# EAGLE board Light module raw (EAGLE 5.10)

Size 17.65 x 3.66 mm. Coordinates in mm from the lower left corner, seen from the top.
Outline: 0,0 0,3.66 17.65,3.66 17.65,0
Copper layers (1*16): Top 0.0356mm / dielectric 1.5011mm / Bottom 0.0356mm
Design rules "LaenPCBOrder": minimum track width 6mil, minimum drill 13mil, track to track 6mil, track to pad 6mil, pad to pad 6mil, via to via 6mil, smd to smd 6mil, copper to edge 15mil, drill to drill 6mil, minimum pad ring 7mil, minimum via ring 7mil, stop-mask expansion 4mil, vias tented up to drill 0mil, thermal gap 10mil
Holes 0.4 mm at 0.83,0.83 1.83,0.83 4.03,0.83 4.03,1.83 4.03,2.83 3.13,2.83 3.13,1.83 3.13,0.83 9.03,0.83 8.13,0.83 9.03,1.83 8.13,1.83 9.03,2.83 8.13,2.83 14.03,0.83 13.13,0.83 14.03,1.83 13.13,1.83 14.03,2.83 13.13,2.83 15.83,0.83 15.83,1.83 15.83,2.83

## Placement (x,y rotation side)
E$1  [EW_HEAD_SILK_NOHAIR]  11.33,1.83 0 bottom
E$2  [JW_HEAD_SILK]  6.13,1.83 0 bottom

## Library data of the parts
E$1 E$2 = walthour

## Tracks (layer width: path | path; a pad name or v marks a point on that pad's centre or on a via)
(copper drawn outside any net)
  shapes: Bottom area x5, Top area x6